# Altium PCB LED2.PcbDoc
Units mm, origin at the board's own origin, x right, y up, seen from the top; angles counter-clockwise.
Board outline 85.09 x 33.02 mm, 2 copper layers (Top Layer, Bottom Layer); 7 components, 14 nets, 67 pads, 0 vias.
Unrouted connection lines stored in the file: 4.
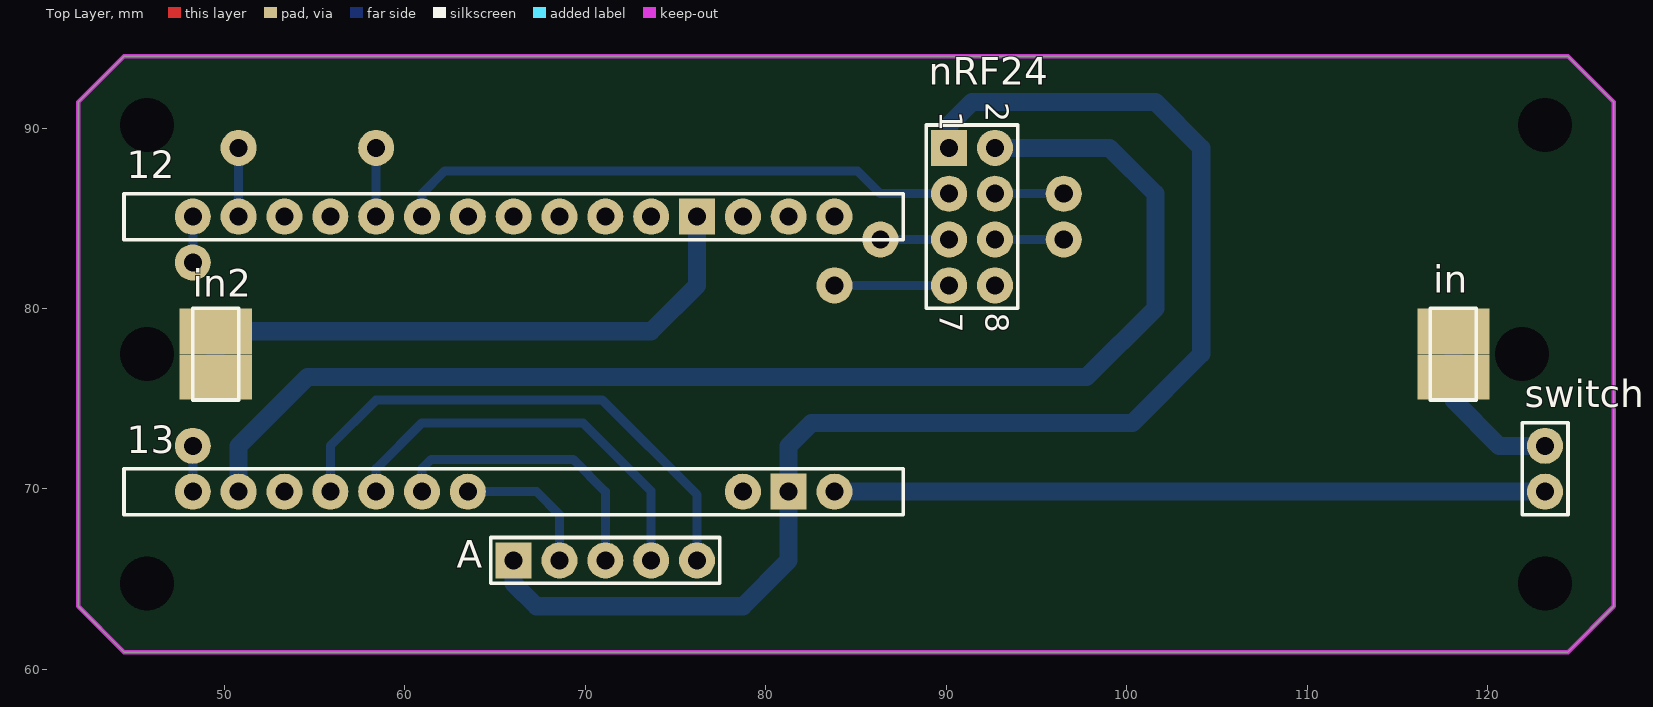
[diagram p0: Top Layer view]
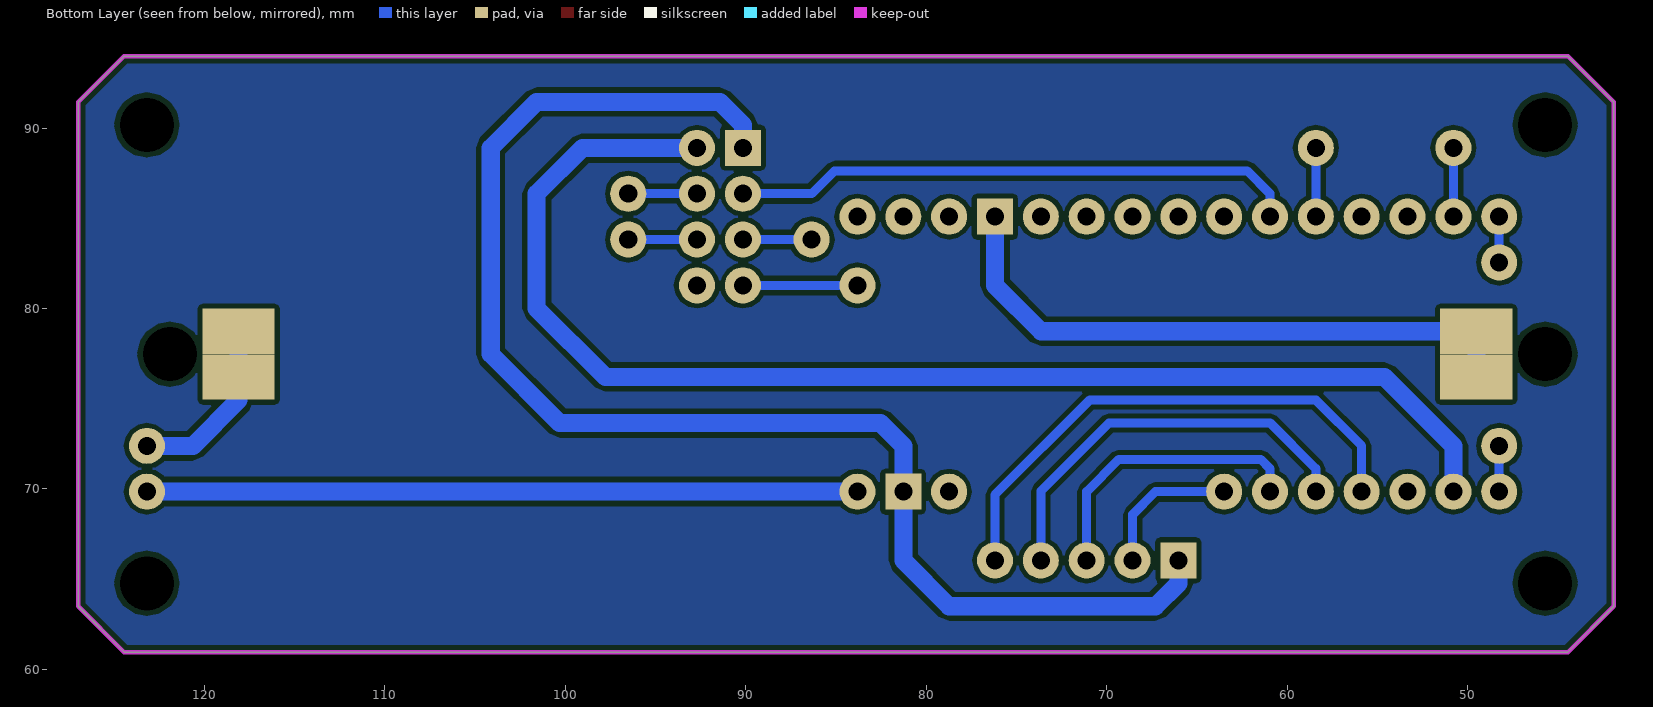
[diagram p1: Bottom Layer view, seen from below]

## Layer stack, top to bottom
Top Solder: solder mask 0.0102, Solder Resist, Dk 3.5
Top Layer: signal copper 0.0356
Dielectric 1: dielectric 0.32, FR-4, Dk 4.8
Bottom Layer: signal copper 0.0356
Bottom Solder: solder mask 0.0102, Solder Resist, Dk 3.5

## Board outline
44.45,60.96 41.91,63.5 41.91,91.44 44.45,93.98 124.46,93.98 127,91.44 127,63.5 124.46,60.96

## Design rules (kind name [scope] priority, off if disabled: settings)
Clearance [All] p1: gap=0.254 ignorepadtopadclearanceinfootprint=FALSE except(0: Arc-Hole Track-Hole SMDPad-Hole THPad-Hole Via-Hole Fill-Hole Poly-Hole Region-Hole Text-Hole)
PolygonConnect [All] p1: connectstyle=Relief reliefconductorwidth=0.254 reliefentries=4 polygonreliefangle="90 Angle" airgapwidth=0.254
RoutingVias [All] p1: holewidth=0.711 width=1.27 viastyle="Through Hole" minholewidth=0.711 minwidth=1.27 maxholewidth=0.711 maxwidth=1.27
SolderMaskExpansion [All] p1: expansion=0.102
Width Width_1 [InNet('GND','VCC','GND1')] p1: maxlimit=2 minlimit=0.254 preferedwidth=1
Width [All] p2: maxlimit=2 minlimit=0.254 preferedwidth=0.5
30 further rules are at their usual default settings.

## Components (designator, comment, footprint, x,y, rotation, side; value= is the part's Value field where it differs from the comment)
12 "Header 17" HDR1X17#1 45.72,85.09 r0 top
13 "Header 17" HDR1X17#2 45.72,69.85 r0 top
A "Header 5" HDR1X5 76.2,66.04 r180 top
in "Header 2" HDR1X2#1 118.11,76.2 r90 top
in2 "Header 2" HDR1X2#1 49.53,78.74 r270 top
nRF24 "Header 4X2" HDR2X4 90.17,88.9 r270 top
switch "Header 2" HDR1X2#2 123.19,69.85 r90 top

## Footprints (in the part's own frame and the unit in brackets; to place one, negate y for a bottom-side part, rotate by r counter-clockwise, add the part's x,y. Pads: shape width x height; smd on the part's side, far side on the other; paste and mask are expansions set on the pad)
HDR1X2#1 [mm] "Connector; Header; 2 Position"
  rect 2.5x4 all layers, no hole: 1(0,0) 2(2.54,0)
  silkscreen extent -1.27,-1.27 3.81,1.27
HDR1X2#2 [mm] "Connector; Header; 2 Position"
  round 2 hole 1: 1(0,0) 2(2.54,0)
  silkscreen extent -1.27,-1.27 3.81,1.27
HDR1X5 [mm] "Connector; Header; 5 Position"
  round 2 hole 1: 1(0,0) 2(2.54,0) 3(5.08,0) 4(7.62,0)
  rect 2x2 hole 1: 5(10.16,0)
  silkscreen extent -1.27,-1.27 11.43,1.27
HDR1X17#1 [mm] "Connector; Header; 17 Position"
  round 0 all layers, no hole: 1(0,0) 17(40.64,0)
  round 2 hole 1: 2(2.54,0) 3(5.08,0) 4(7.62,0) 5(10.16,0) 6(12.7,0) 7(15.24,0) 8(17.78,0) 9(20.32,0) 10(22.86,0) 11(25.4,0) 12(27.94,0) 14(33.02,0) 15(35.56,0) 16(38.1,0)
  rect 2x2 hole 1: 13(30.48,0)
  silkscreen extent -1.27,-1.27 41.91,1.27
HDR1X17#2 [mm] "Connector; Header; 17 Position"
  round 0 all layers, no hole: 1(0,0) 9(20.32,0) 10(22.86,0) 11(25.4,0) 12(27.94,0) 13(30.48,0) 17(40.64,0)
  round 2 hole 1: 2(2.54,0) 3(5.08,0) 4(7.62,0) 5(10.16,0) 6(12.7,0) 7(15.24,0) 8(17.78,0) 14(33.02,0) 16(38.1,0)
  rect 2x2 hole 1: 15(35.56,0)
  silkscreen extent -1.27,-1.27 41.91,1.27
HDR2X4 [mm] "Connector; Header; 4x2 Position"
  rect 2x2 hole 1: 1(0,0)
  round 2 hole 1: 2(0,2.54) 3(2.54,0) 4(2.54,2.54) 5(5.08,0) 6(5.08,2.54) 7(7.62,0) 8(7.62,2.54)
  silkscreen extent -1.27,-1.27 8.89,3.81

## Part data
12 13: "Header, 17-Pin", LatestRevisionDate=17-Jul-2002, LatestRevisionNote="Re-released for DXP Platform.", Publisher="Altium Limited"
A: "Header, 5-Pin", LatestRevisionDate=17-Jul-2002, LatestRevisionNote="Re-released for DXP Platform.", Publisher="Altium Limited"
in in2 switch: "Header, 2-Pin", LatestRevisionDate=17-Jul-2002, LatestRevisionNote="Re-released for DXP Platform.", Publisher="Altium Limited"
nRF24: "Header, 4-Pin, Dual row", LatestRevisionDate=17-Jul-2002, LatestRevisionNote="Re-released for DXP Platform.", Publisher="Altium Limited"

## Free pads (board coordinates)
  round 0 hole 3: 4(45.72,64.77) 6(45.72,90.17) 13(123.19,90.17) 14(123.19,64.77) 49(121.92,77.47) 50(45.72,77.47)
  round 2 hole 1: 64(48.26,72.39) 67(96.52,86.36) 68(96.52,83.82) 69(86.36,83.82) 70(58.42,88.9) 71(50.8,88.9) 72(83.82,81.28) 73(48.26,82.55)

## Nets (pads, with @x,y where several pads share a name; then routed paths per layer and width w, separated by ;. In a path a pad name is that pad's centre, name@x,y a point inside that pad or via, vN(x,y) a via of type N, cw(c..) or ccw(c..) an arc to the next point about the centre after c; other vN are vias at no path point)
GND: 12.13 in2.1 in2.2 | length 34.1
  Bottom Layer w1: in2.2 in2.1 73.66,78.74 76.2,81.28 12.13
GND1: 13.15 A.5 nRF24.1 | length 77.7
  Bottom Layer w1: A.5 66.04,64.77 67.31,63.5 78.74,63.5 81.28,66.04 13.15 81.28,72.39 82.55,73.66 100.33,73.66 104.14,77.47 104.14,88.9 101.6,91.44 91.44,91.44 90.17,90.17 nRF24.1
Net12_2: 12.2 nRF24.7 pad.72 pad.73 | length 8.9
  Bottom Layer w0.5: pad.73 12.2 ; pad.72 nRF24.7
Net12_3: 12.3 nRF24.6 pad.68 pad.71 | length 7.6
  Bottom Layer w0.5: 12.3 pad.71 ; nRF24.6 pad.68
Net12_6: 12.6 nRF24.4 pad.67 pad.70 | length 7.6
  Bottom Layer w0.5: 12.6 pad.70 ; nRF24.4 pad.67
Net12_7: 12.7 nRF24.3 | length 31.5
  Bottom Layer w0.5: 12.7 60.96,86.36 62.23,87.63 85.09,87.63 86.36,86.36 nRF24.3
Net13_2: 13.2 nRF24.5 pad.64 pad.69 | length 6.3
  Bottom Layer w0.5: 13.2 pad.64 ; pad.69 nRF24.5
Net13_5: 13.5 A.1 | length 29.9
  Bottom Layer w0.5: 13.5@56.053,69.85 13.5 55.88,72.39 58.42,74.93 70.941,74.93 76.2,69.671 A.1
Net13_6: 13.6 A.2 | length 23
  Bottom Layer w0.5: 13.6 58.42,71.12 60.96,73.66 69.875,73.66 73.66,69.875 A.2
Net13_7: 13.7 A.3 | length 16.2
  Bottom Layer w0.5: 13.7 60.96,71.12 61.476,71.636 69.334,71.636 71.12,69.85 A.3
Net13_8: 13.8 A.4 | length 8.1
  Bottom Layer w0.5: 13.8 67.31,69.85 68.58,68.58 A.4
Net13_16: 13.16 switch.1 | length 39.4
  Bottom Layer w1: 13.16 switch.1
Netin_1: in.1 in.2 switch.2 | length 9.9
  Bottom Layer w1: in.2 in.1 118.11,74.93 120.65,72.39 switch.2
VCC: 13.3 nRF24.2 | length 72.8
  Bottom Layer w1: 13.3 50.8,72.39 54.61,76.2 97.79,76.2 101.6,80.01 101.6,86.36 99.06,88.9 nRF24.2
pads on no net: 12.1 12.4 12.5 12.8 12.9 12.10 12.11 12.12 12.14 12.15 12.16 12.17 13.1 13.4 13.9 13.10 13.11 13.12 13.13 13.14 13.17 nRF24.8

## Polygon pours and split planes (outlines as drawn)
no net on Bottom Layer "Top Layer-No Net" (solid, pour order 4): 44.45,60.96 41.91,63.5 41.91,91.44 44.45,93.98 124.46,93.98 127,91.44 127,63.5 124.46,60.96

## Keep-outs
Keep-Out Layer:
  lines w0.254: 41.91,63.5 44.45,60.96 124.46,60.96 127,63.5 127,91.44 124.46,93.98 44.45,93.98 41.91,91.44 41.91,89.535 41.91,63.5

## Text inside footprints (layer, text, board x,y; h text height)
nRF24: Top Overlay "8" at 92.202,79.756 h1.27 r270; Top Overlay "7" at 89.662,79.756 h1.27 r270; Top Overlay "1" at 89.662,90.932 h1.27 r270; Top Overlay "2" at 92.202,91.44 h1.27 r270